# EAGLE board MRC-RJ45-CMRI (EAGLE 7.7.0)
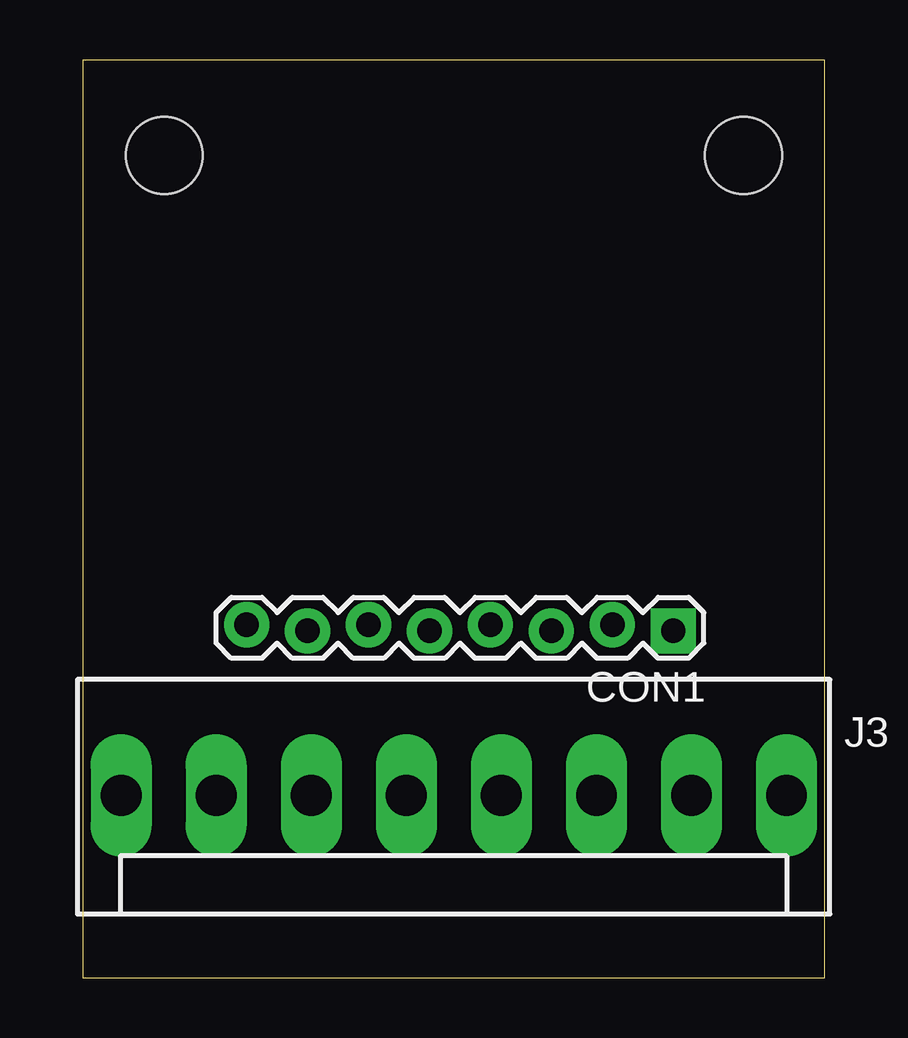
[diagram p0: board, top side]
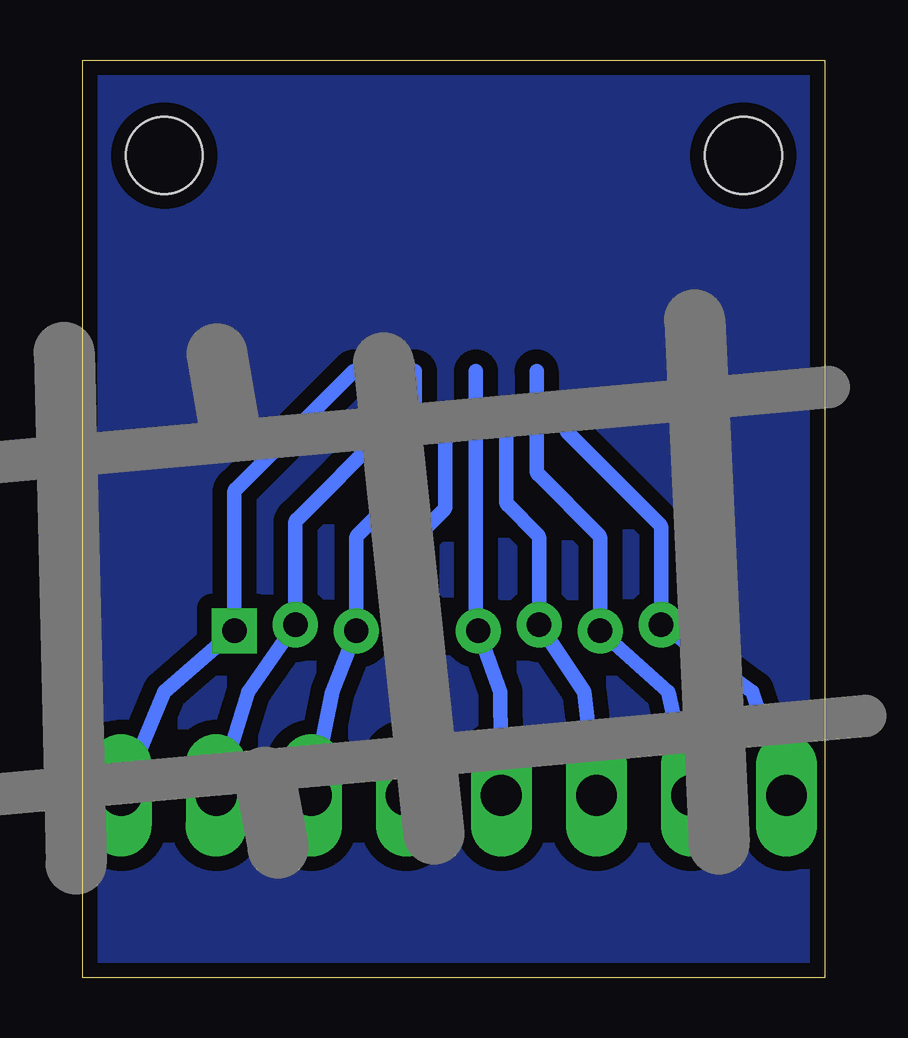
[diagram p1: board, bottom side, seen from below]

Size 30.91 x 38.27 mm. Coordinates in mm from the lower left corner, seen from the top.
Outline: 0,0 30.91,0 30.91,38.27 0,38.27 0,0
Copper layers (1*16): Top 0.035mm / dielectric 1.5mm / Bottom 0.035mm
Design rules "Fusion_eagle_rule_v1.1": minimum track width 6mil, minimum drill 12mil, track to track 6mil, track to pad 6mil, pad to pad 6mil, via to via 6mil, smd to smd 0mil, copper to edge 10mil, drill to drill 10mil, minimum pad ring 10mil, minimum via ring 6mil, stop-mask expansion 2mil, vias tented up to drill 100mil, thermal gap 10mil
Net classes: 0 default: width 0.508 mm
Holes 3.2 mm at 3.39,34.28 27.52,34.28

## Footprints (pad centres in the part's own frame; a part is rotated, then mirrored left to right if it is on the bottom)
1X08_LOCK = drill 1.016 pad 1.88 square: 1 0,0.127 | drill 1.016 pad 1.88: 2 2.54,-0.127; 3 5.08,0.127; 4 7.62,-0.127; 5 10.16,0.127; 6 12.7,-0.127; 7 15.24,0.127; 8 17.78,-0.127
KK-156-8 = drill 1.7 pad 2.184 long: 1 -13.86,0; 2 -9.9,0; 3 -5.94,0; 4 -1.98,0; 5 1.98,0; 6 5.94,0; 7 9.9,0; 8 13.86,0

## Placement (x,y rotation side)
CON1  [1X08_LOCK]  24.6,14.6 180 top
J3  [KK-156-8]  15.46,7.62 180 top

## Library data of the parts
CON1 = SPCoast
J3 = con-molex; OC_FARNELL: unknown; OC_NEWARK: unknown

## Nets
L1: CON1.1 J3.1
L2: CON1.2 J3.2
L3: CON1.3 J3.3
L4: CON1.4 J3.4
L5: CON1.5 J3.5
L6: CON1.6 J3.6
L7: CON1.7 J3.7
L8: CON1.8 J3.8

## Tracks (layer width: path | path; a pad name or v marks a point on that pad's centre or on a via)
GND
  pour Bottom (isolate 0.61): 0.22,38.09 30.7,38.09 30.7,0.63 0.22,0.63
L1
  Bottom 0.61: 19.62,25.29 24.53,20.39 arc-45 24.6,20.21 CON1.1 27.52,11.93 J3.1
L2
  Bottom 0.61: J3.2 24.02,11.93 CON1.2 22.06,18.94 arc45 21.99,19.12 18.35,22.75
L3
  Bottom 0.61: J3.3 20.52,11.93 CON1.3 19.52,18.3 arc45 19.45,18.48 17.16,20.77 arc-45 17.08,20.95 17.08,25.29
L4
  Bottom 0.61: J3.4 17.02,11.93 CON1.4 16.98,18.3 arc45 16.91,18.48 15.89,19.5 arc-45 15.81,19.68 15.81,22.75
L5
  Bottom 0.61: J3.5 13.52,11.93 CON1.5 arc90 14.54,14.57 14.54,25.29
L6
  Bottom 0.61: J3.6 10.02,11.93 CON1.6 11.9,18.3 arc-45 11.97,18.48 13.2,19.71 arc45 13.27,19.89 13.27,22.75
L7
  Bottom 0.61: J3.7 6.52,11.93 CON1.7 9.36,18.3 arc-45 9.43,18.48 11.93,20.98 arc45 12,21.16 12,25.29
L8
  Bottom 0.61: 10.73,22.75 6.89,18.92 arc45 6.82,18.74 CON1.8 3.02,11.93 J3.8

## Text on the board
tDocu: v2.0p | 2023.09 | 3.5mm | 3.5mm | GND | GND | SPCoast | CMRI | Breakout | 0.100 | 3.5mm | 0.156
bDocu: Made in the PCR, Coast Division, NMRA | CMRI | www. | Breakout | SP Coast | .com | Solder Side | CMRI Accessory | Go Bears! | Model Railroading is fun!
_tNames: J1 | J1